# Altium PCB SolarSenseSlave.PcbDoc (part 1 of 2)
Units mm, origin at the board's own origin, x right, y up, seen from the top; angles counter-clockwise.
Board outline 120 x 80 mm, 2 copper layers (Top Layer, Bottom Layer); 75 components, 36 nets, 195 pads, 65 vias.
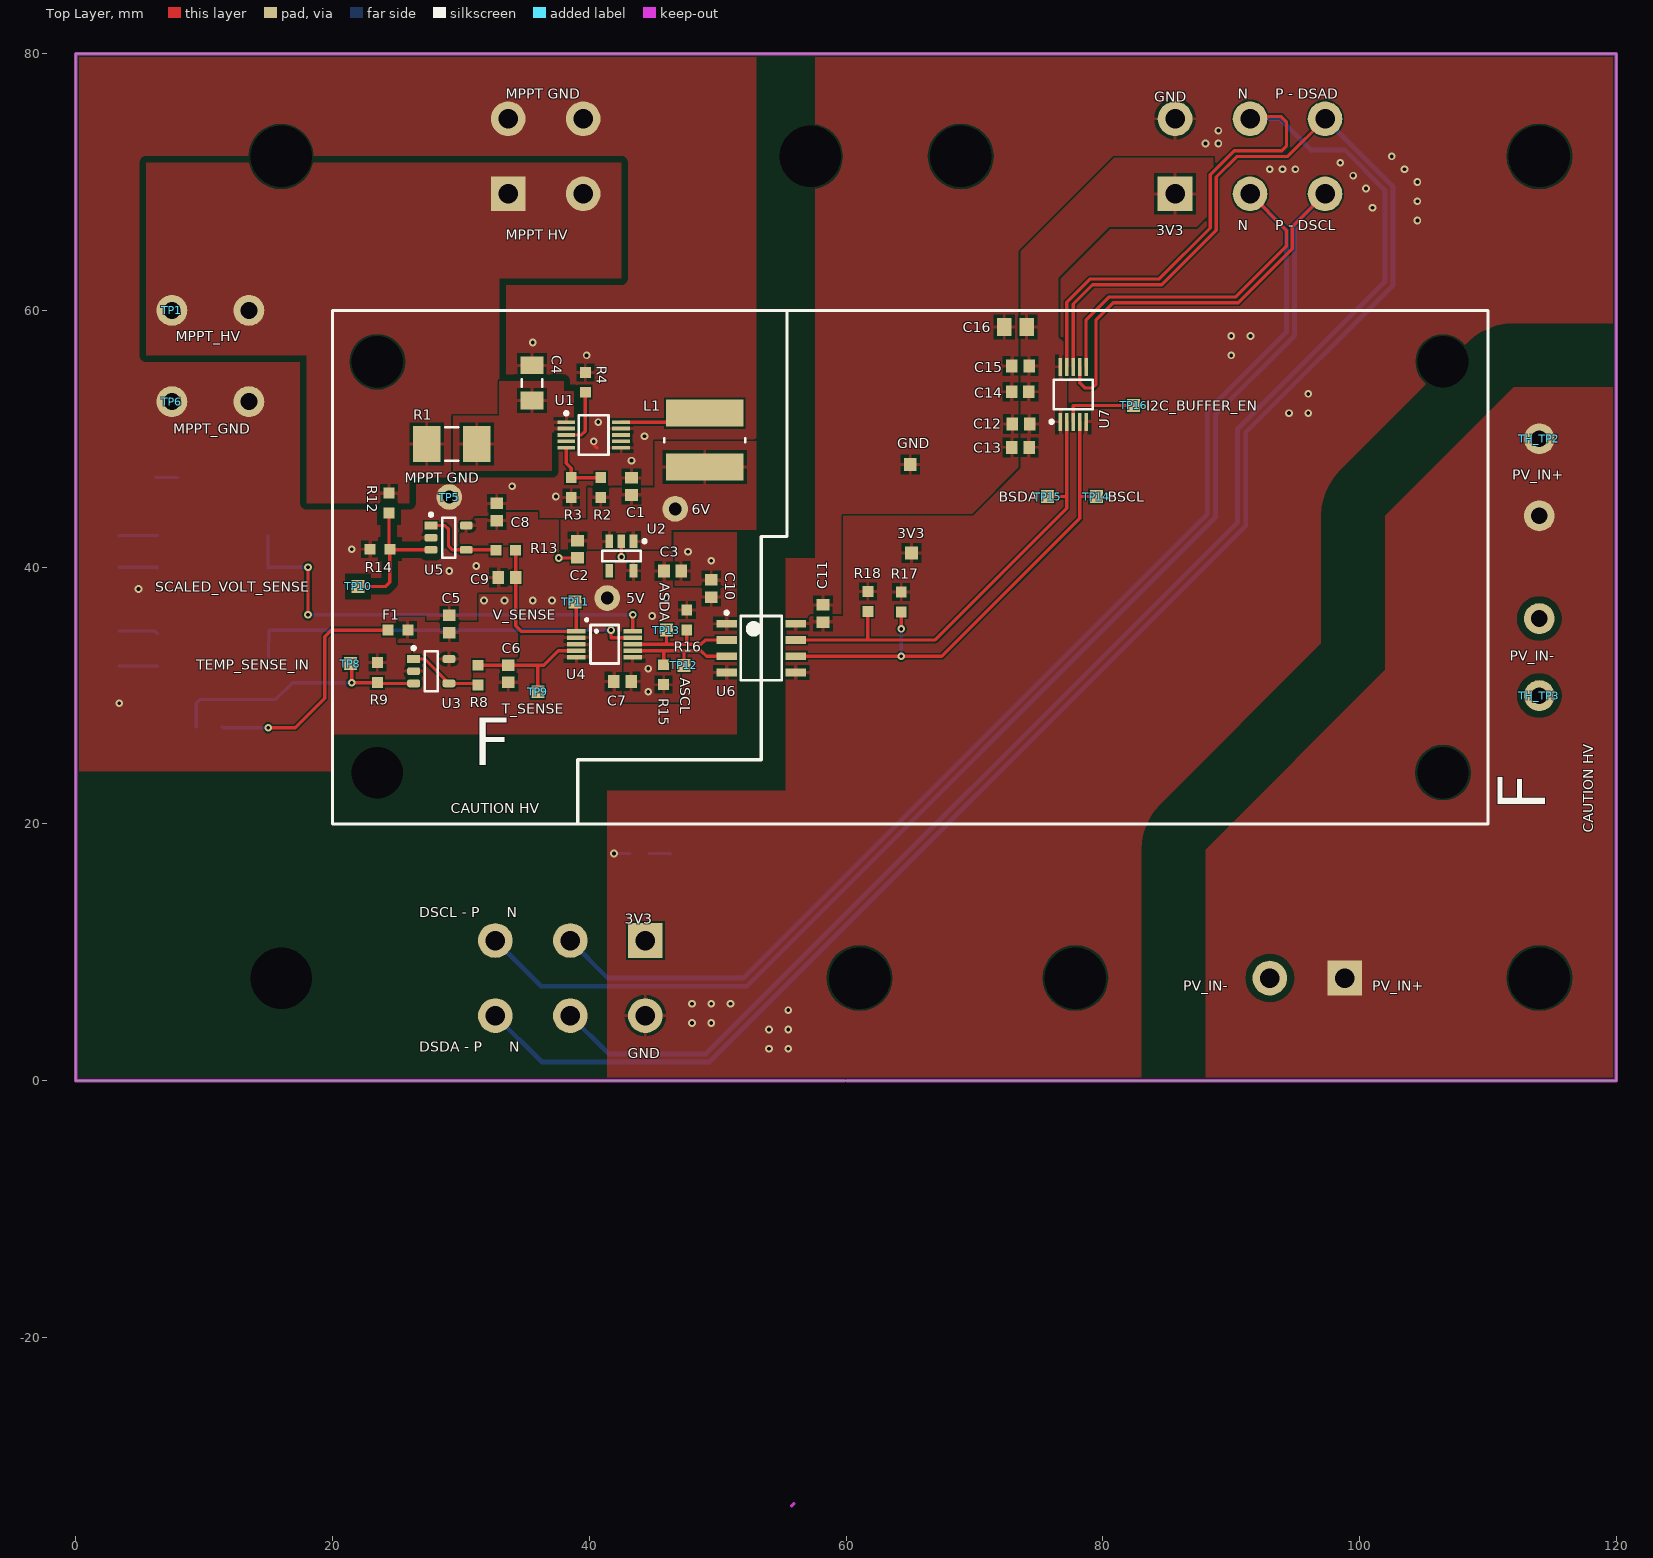
[diagram p0: Top Layer view]
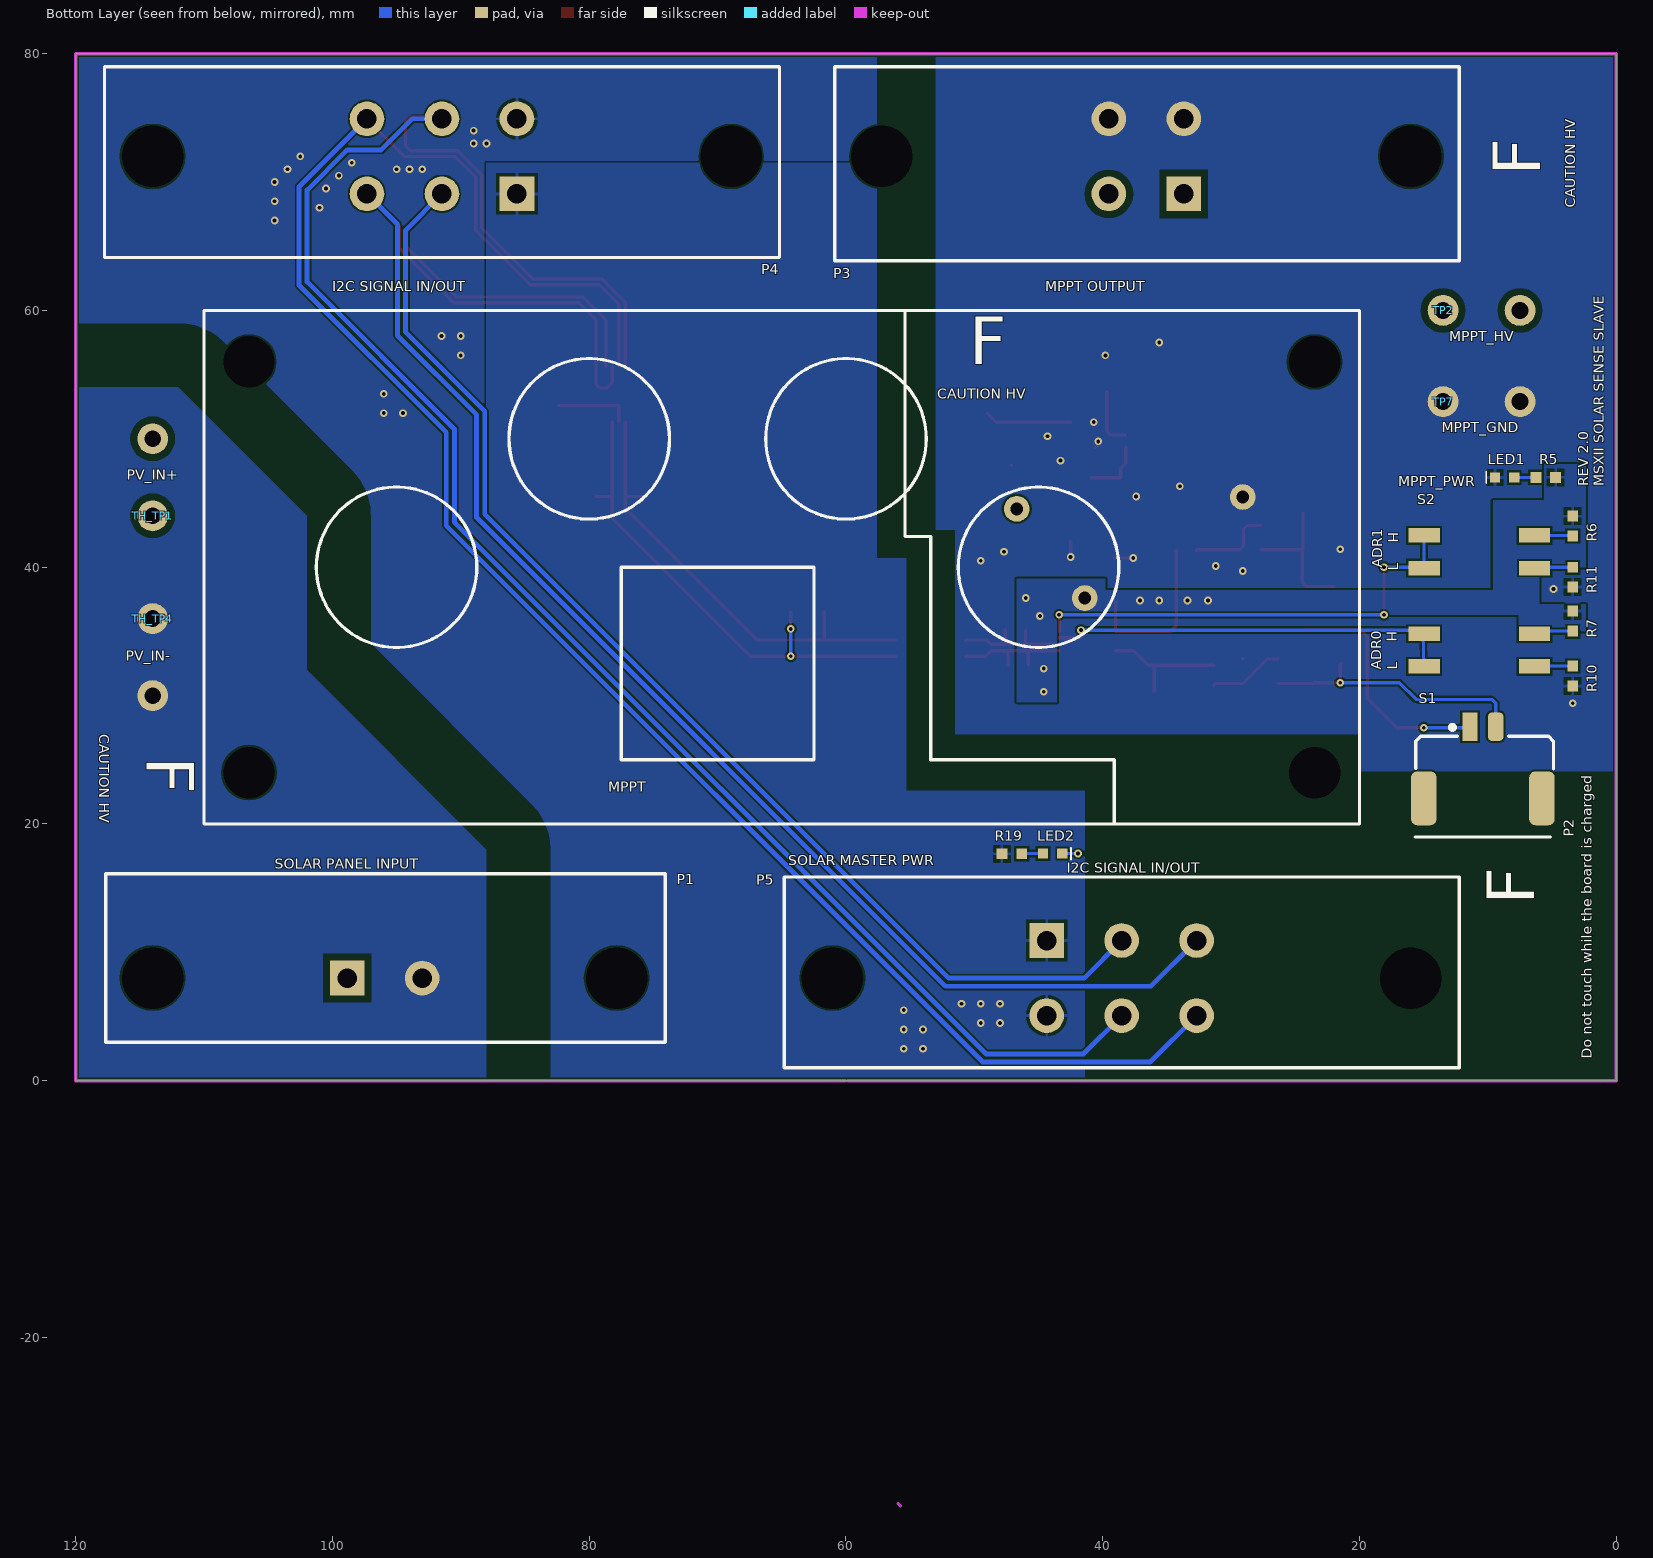
[diagram p1: Bottom Layer view, seen from below]
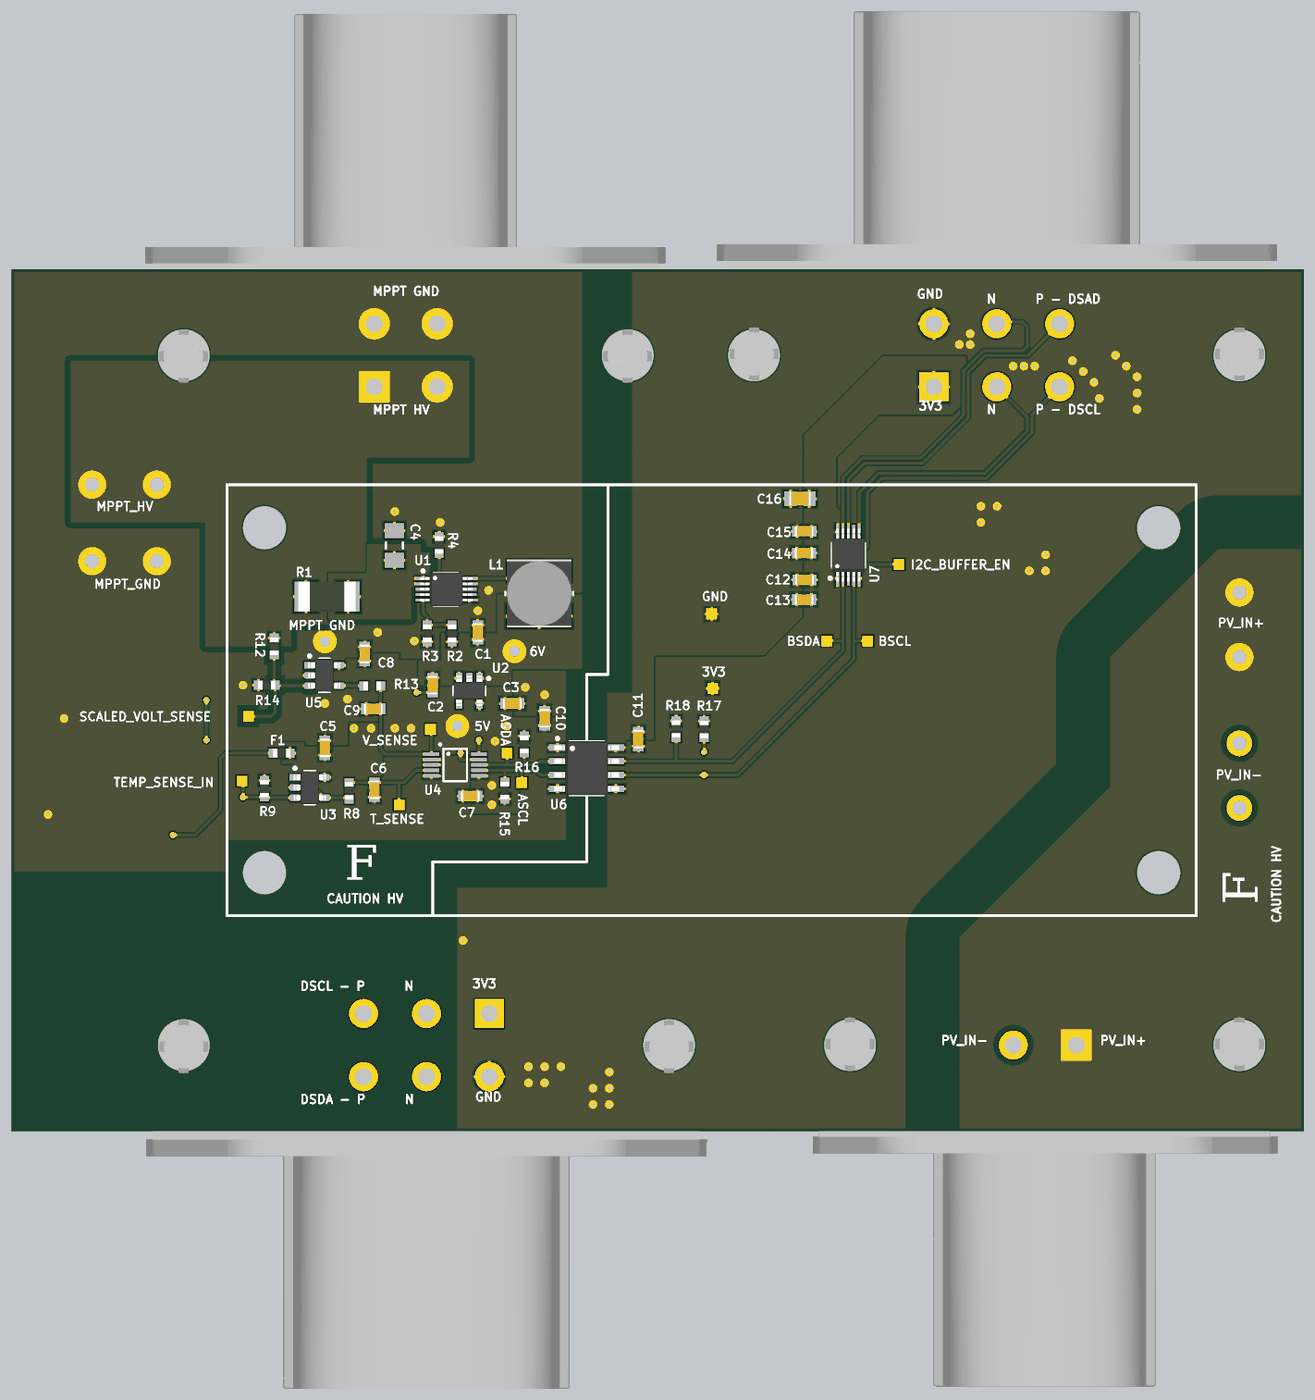
[diagram p2: 3D render of the assembled board from above, using the file's embedded part models]
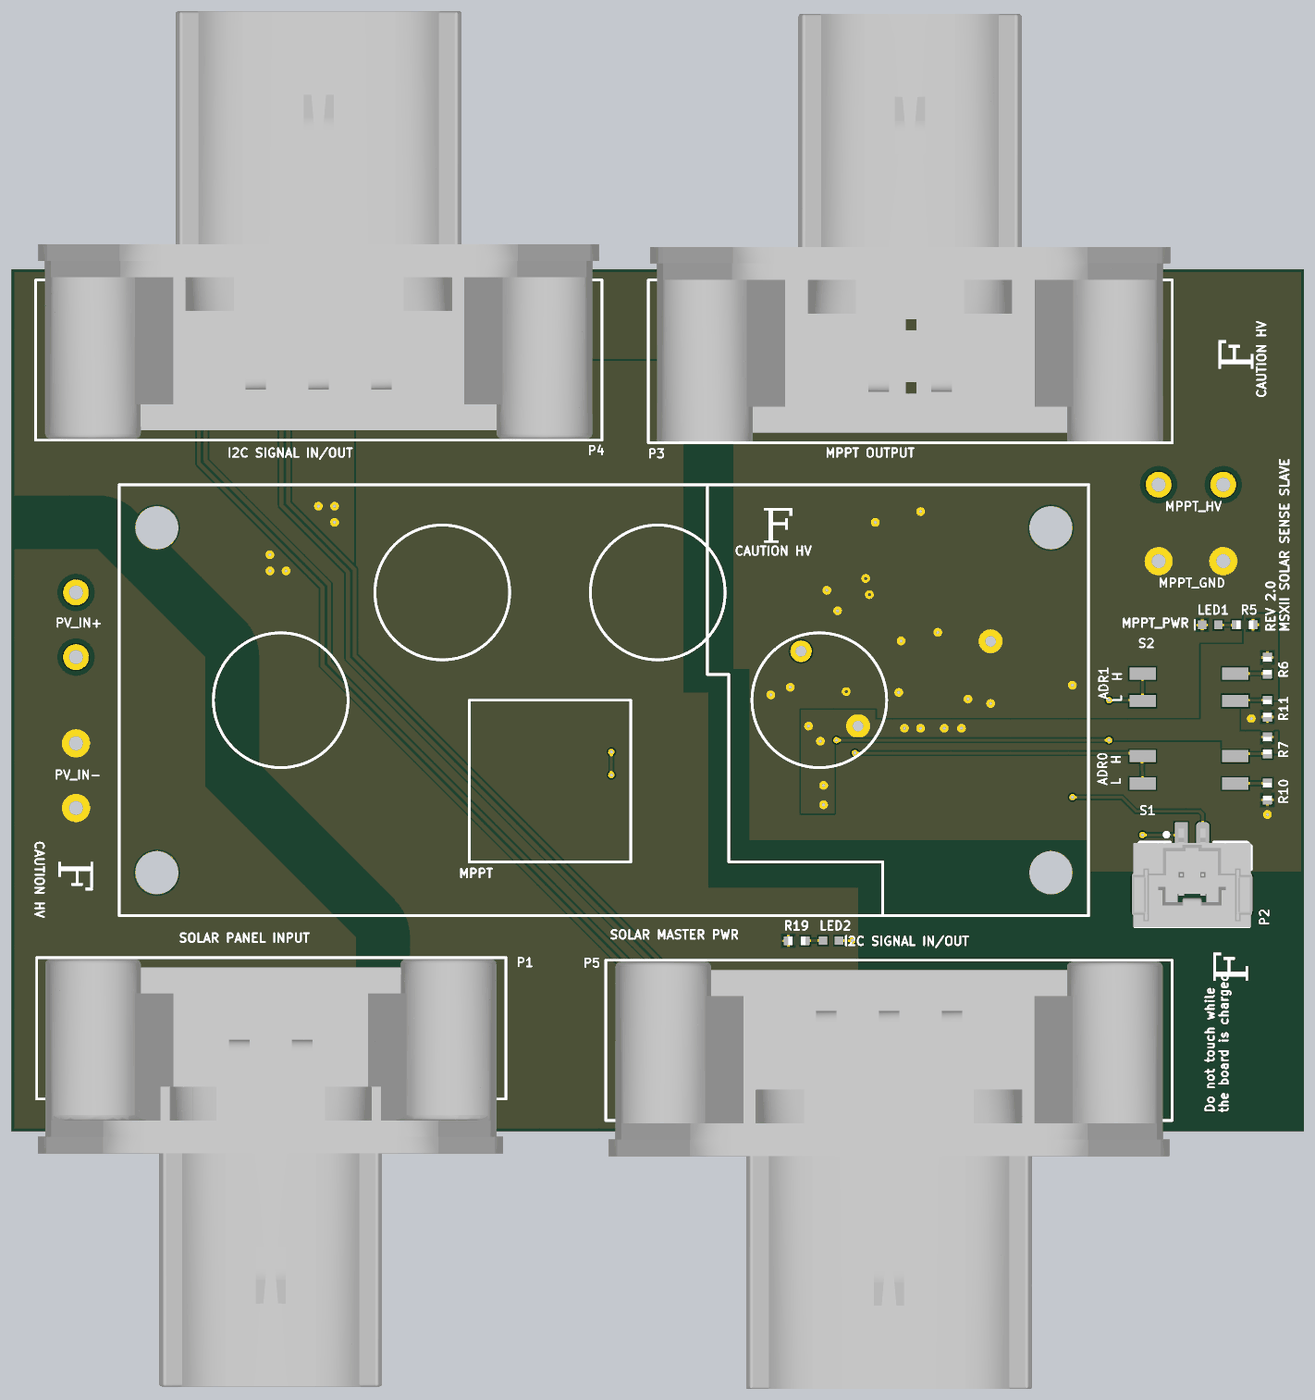
[diagram p3: 3D render of the assembled board from below, using the file's embedded part models]

## Layer stack, top to bottom
Top Solder: solder mask 0.0102, Solder Resist, Dk 3.5
Top Layer: signal copper 0.0356
Dielectric 1: dielectric 0.32, FR-4, Dk 4.8
Bottom Layer: signal copper 0.0356
Bottom Solder: solder mask 0.0102, Solder Resist, Dk 3.5

## Board outline
120,0 0,0 0,80 120,80

## Design rules (kind name [scope] priority, off if disabled: settings)
Clearance HV_Clearance_to_GND [InNetClass('HV') vs InNet('MPPT_GND')] p1: gap=0.53 ignorepadtopadclearanceinfootprint=TRUE except(0.52: Arc-SMDPad Track-SMDPad)
Clearance Clearance_PV [InNet('PV_IN+') vs InNet('PV_IN-')] p2: gap=0.53 ignorepadtopadclearanceinfootprint=TRUE except(0.52: Arc-SMDPad Track-SMDPad)
Clearance Clearance_PV_to_LOW_V [InNet('PV_IN+') OR InNet('PV_IN-') vs InNet('3V3') OR InNet('GND')] p3: gap=5 ignorepadtopadclearanceinfootprint=TRUE
Clearance [All] p4: gap=0.152 ignorepadtopadclearanceinfootprint=FALSE except(0: Arc-Hole Track-Hole SMDPad-Hole THPad-Hole Via-Hole Fill-Hole Poly-Hole Region-Hole Text-Hole)
ComponentClearance ComponentClearance_ControllerBoard [InComponent('P1') vs Identifier = 'Controller-Board'] p1: gap=0 collisioncheckmode=3 verticalgap=0 showdistances=FALSE
ComponentClearance ComponentClearance_Standoffs [Identifier = 'Standoff' vs Identifier = 'Controller-Board'] p2: gap=0 collisioncheckmode=3 verticalgap=0 showdistances=FALSE
ComponentClearance [All] p3: gap=0.254 collisioncheckmode=3 verticalgap=0.254 showdistances=FALSE
DiffPairsRouting DiffPairsRouting_DI2C [InDifferentialPair('DSCL') OR InDifferentialPair('DSDA')] p1: maxlimit=0.254 minlimit=0.2 mostfreqgap=0.2 toplayer_minwidth=0.25 toplayer_maxwidth=0.381 toplayer_prefwidth=0.254 bottomlayer_minwidth=0.25 bottomlayer_maxwidth=0.381 bottomlayer_prefwidth=0.254 maxuncoupledlength=12.7
DiffPairsRouting [All] p2: maxlimit=0.254 minlimit=0.15 mostfreqgap=0.254 toplayer_minwidth=0.2 toplayer_maxwidth=0.381 toplayer_prefwidth=0.381 bottomlayer_minwidth=0.2 bottomlayer_maxwidth=0.381 bottomlayer_prefwidth=0.381 maxuncoupledlength=12.7
Height "Height - MX150L" [HasFootprint('CONN, 4POS MX150L') OR HasFootprint('CONN, 6POS MX150L') OR HasFootprint('CONN, 2POS MX150L')] p1: minheight=0 maxheight=50 prefheight=12.7
Height [All] p2: minheight=0 maxheight=25.4 prefheight=12.7
HoleSize [All] p1: absolutevalues=TRUE maxlimit=6.3 minlimit=0.3 maxpercent=80.000 minpercent=20.000
MinimumAnnularRing [All] p1: minimumring=0.15
MinimumSolderMaskSliver [All] p1 off: minsoldermaskwidth=0.3
PolygonConnect PolygonConnect_NoThermal [Not(IsPad) vs IsPolygon] p1: connectstyle=Direct reliefconductorwidth=0.254 reliefentries=4 polygonreliefangle="90 Angle" airgapwidth=0.254
PolygonConnect PolygonConnect_HV [InNetClass('HV') OR InNet('+6V') OR InNet('MPPT_5V')] p2: thpad.connectstyle=Direct thpad.reliefconductorwidth=0.254 thpad.reliefentries=4 thpad.polygonreliefangle="90 Angle" thpad.airgapwidth=0.254 smdpad.connectstyle=Relief smdpad.reliefconductorwidth=0.254 smdpad.reliefentries=4 smdpad.polygonreliefangle="90 Angle" smdpad.airgapwidth=0.254 via.connectstyle=Relief via.reliefconductorwidth=0.254 via.reliefentries=4 via.polygonreliefangle="90 Angle" via.airgapwidth=0.254
PolygonConnect [IsPad] p3: connectstyle=Relief reliefconductorwidth=0.254 reliefentries=4 polygonreliefangle="90 Angle" airgapwidth=0.254
RoutingVias [All] p1: holewidth=0.3 width=0.6 viastyle="Through Hole" minholewidth=0.3 minwidth=0.6 maxholewidth=0.711 maxwidth=1.27
SilkToSolderMaskClearance [IsPad] p1: minsilkscreentomaskgap=0.178 clearancetoexposedcopper=TRUE
SolderMaskExpansion [All] p1: expansion=0.102
Width [All] p1: maxlimit=2.54 minlimit=0.152 preferedwidth=0.254
24 further rules are at their usual default settings.

## Classes and differential pairs
component class I2CInterface: 3V3 C10 C11 C12 C13 C14 C15 C16 GND P4 P5 R15 R16 R17 R18 TP12 TP13 TP14 TP15 TP16 U6 U7
net class HV: MPPT_GND MPPT_HV NetR12_2 PV_IN+ PV_IN- REG_VIN
component class PowerSupplies: 5V 6V C1 C2 C3 C4 L1 LED1 LED2 P1 R1 R2 R3 R4 R5 R19 TH_TP1 TH_TP2 TH_TP3 TH_TP4 TP1 TP2 TP5 TP6 TP7 U1 U2
component class SolarSenseBoard: C5 C6 C7 C8 C9 F1 P2 P3 R6 R7 R8 R9 R10 R11 R12 R13 R14 S1 S2 TP8 TP9 TP10 TP11 U3 U4 U5
differential pair DSDA: +DSDA_P -DSDA_N
differential pair DSCL: +DSCL_P -DSCL_N

## Components (designator, comment, footprint, x,y, rotation, side; value= is the part's Value field where it differs from the comment)
3V3 "3V3" "Test Point" 65.1,41.1 r270 top (schematic designator TP17)
5V "MPPT_5V" "Thru Test Point"#1 41.4,37.6 r270 top (schematic designator TP4)
6V "MPPT_6V" "Thru Test Point"#1 46.7,44.544 r0 top (schematic designator TP3)
C1 "CAP CER 10uF 25V 20% X5R 0603" "CAP, 0603" 43.3,46.3 r90 top
C2 "CAP CER 1UF 50V 10% X7R 0603" "CAP, 0603" 39.1,41.4 r270 top
C3 "CAP CER 2.2UF 25V 10% X5R 0603" "CAP, 0603" 46.5,39.7 r0 top
C4 "CAP CER 2.2UF 100V ±20% X7R 1206" "CAP, 1206" 35.553,54.354 r90 top
C5 "CAP CER 0.1UF 50V 10% X7R 0603" "CAP, 0603" 29.1,35.579 r90 top
C6 "CAP CER 10nF 50V 5% X7R 0603" "CAP, 0603" 33.7,31.7 r270 top
C7 "CAP CER 0.1UF 50V 10% X7R 0603" "CAP, 0603" 42.6,31.1 r180 top
C8 "CAP CER 0.1UF 50V 10% X7R 0603" "CAP, 0603" 32.8,44.3 r90 top
C9 "CAP CER 10nF 50V 5% X7R 0603" "CAP, 0603" 33.6,39.2 r180 top
C10 "CAP CER 0.1UF 50V 10% X7R 0603" "CAP, 0603" 49.5,38.334 r90 top
C11 "CAP CER 0.1UF 50V 10% X7R 0603" "CAP, 0603" 58.2,36.4 r90 top
C12 "CAP CER 0.1UF 50V 10% X7R 0603" "CAP, 0603" 73.625,51.164 r180 top
C13 "CAP CER 0.1UF 50V 10% X7R 0603" "CAP, 0603" 73.587,49.334 r180 top
C14 "CAP CER 0.1UF 50V 10% X7R 0603" "CAP, 0603" 73.575,53.664 r180 top
C15 "CAP CER 0.1UF 50V 10% X7R 0603" "CAP, 0603" 73.6,55.664 r180 top
C16 "CAP CER 10uF 25V 10% X5R 0805" "CAP, 0805" 73.2,58.7 r180 top
F1 "FUSE 250MA 32VDC 0603" "RES, 0603" 25.1,35.1 r0 top
GND "GND" "Test Point" 65,48 r270 top (schematic designator TP18)
L1 "IND 220uH 0.59A 20%" INDP6060X23N 49,49.9 r270 top
LED1 "LED GREEN CLEAR 2V 0603" LED_0603 8,47 r0 bottom
LED2 "LED GREEN CLEAR 2V 0603" LED_0603 44.611,17.69 r180 bottom
P1 "CONN 2POS MX150L" "CONN, 2POS MX150L" 98.85,8 r180 bottom locked
P2 "Dura-Clik" "CONN, 2POS Dura-Click Vertical" 11.4,27.58 r180 bottom
P3 "CONN 4POS MX150L" "CONN, 4POS MX150L" 33.69,69.075 r0 bottom locked
P4 "CONN 6POS MX150L" "CONN, 6POS MX150L" 85.63,69.075 r0 bottom locked
P5 "CONN 6POS MX150L" "CONN, 6POS MX150L" 44.37,10.925 r180 bottom locked
R1 "RES 820 OHM 5% 3/4W 2010" "RES 2010" 29.3,49.6 r0 top
R2 "RES 255K OHM 1% 1/10W 0603" "RES, 0603" 40.9,46.2 r270 top
R3 "RES 39.2K OHM 1% 1/10W 0603" "RES, 0603" 38.6,46.2 r270 top
R4 "RES 191K OHM 1% 1/10W 0603" "RES, 0603" 39.7,54.4 r90 top
R5 "RES 3.3K OHM 1% 1/4W 0603" "RES, 0603" 5.5,47 r0 bottom
R6 "RES 10K OHM 1% 1/10W 0603" "RES, 0603" 3.4,43.2 r270 bottom
R7 "RES 10K OHM 1% 1/10W 0603" "RES, 0603" 3.4,35.8 r270 bottom
R8 "RES 100 OHM 1% 1/10W 0603" "RES, 0603" 31.351,31.586 r90 top
R9 "RES 10K OHM 1% 1/10W 0603" "RES, 0603" 23.5,31.8 r90 top
R10 "RES 10K OHM 1% 1/10W 0603" "RES, 0603" 3.4,31.525 r270 bottom
R11 "RES 10K OHM 1% 1/10W 0603" "RES, 0603" 3.4,39.225 r270 bottom
R12 "RES 470K OHM 1% 1/4W 0603" "RES, 0603" 24.4,45 r270 top
R13 "RES 100 OHM 1% 1/10W 0603" "RES, 0603" 33.5,41.324 r0 top
R14 "RES 26.1K OHM 1% 1/10W 0603" "RES, 0603" 23.7,41.4 r180 top
R15 "RES 3.3K OHM 1% 1/4W 0603" "RES, 0603" 45.8,31.625 r90 top
R16 "RES 3.3K OHM 1% 1/4W 0603" "RES, 0603" 47.6,35.9 r270 top
R17 "RES 3.3K OHM 1% 1/4W 0603" "RES, 0603" 64.3,37.3 r270 top
R18 "RES 3.3K OHM 1% 1/4W 0603" "RES, 0603" 61.7,37.325 r270 top
R19 "RES 3.3K OHM 1% 1/4W 0603" "RES, 0603" 47.086,17.68 r180 bottom
S1 "SPST" "SW SPST 2POS DIP 0.1A 20V" 10.675,34.815 r270 bottom
S2 "SPST" "SW SPST 2POS DIP 0.1A 20V" 10.675,42.475 r270 bottom
TH_TP1 "PV_IN+" "Thru Test Point"#2 114,44 r180 bottom
TH_TP2 "PV_IN+" "Thru Test Point"#2 114,50 r180 top
TH_TP3 "PV_IN-" "Thru Test Point"#2 114,30 r180 top
TH_TP4 "PV_IN-" "Thru Test Point"#2 114,36 r180 bottom
TP1 "MPPT_HV" "Thru Test Point"#2 7.5,60 r90 top
TP2 "MPPT_HV" "Thru Test Point"#2 13.5,60 r0 bottom
TP5 "MPPT GND" "Thru Test Point"#1 29.1,45.468 r0 top
TP6 "MPPT_GND" "Thru Test Point"#2 7.5,52.9 r270 top
TP7 "MPPT_GND" "Thru Test Point"#2 13.5,52.9 r270 bottom
TP8 "TEMP_SENSE_IN" "Test Point" 21.4,32.5 r180 top
TP9 "T_SENSE" "Test Point" 36,30.3 r90 top
TP10 "SCALED_VOLT_SENSE" "Test Point" 22,38.5 r270 top
TP11 "V_SENSE" "Test Point" 38.9,37.3 r270 top
TP12 "ASCL" "Test Point" 47.381,32.349 r270 top
TP13 "ASDA" "Test Point" 46.019,35.1 r270 top
TP14 "BSCL" "Test Point" 79.5,45.5 r270 top
TP15 "BSDA" "Test Point" 75.7,45.5 r270 top
TP16 "I2C_BUFFER_EN" "Test Point" 82.4,52.6 r270 top
U1 "IC REG BUCK ADJ 0.1A 10UMAX" TSSOP50P490X110-10N 40.351,50.3 r0 top
U2 "IC REG LDO 5V 0.1A SOT23-5" SOT95P280X145-5N 42.504,40.875 r270 top
U3 "IC OP AMP GEN PURPOSE RR 10MHZ SOT-23-5" "IC OP AMP GP RR 10MHZ SOT-23-5" 27.7,31.9 r0 top
U4 "IC ADC MCP3427 10MSOP" "IC ADC MCP3427" 41.2,34 r0 top
U5 "IC OP AMP GEN PURPOSE RR 10MHZ SOT-23-5" "IC OP AMP GP RR 10MHZ SOT-23-5" 29.051,42.3 r0 top
U6 "IC DGTL ISO I2C 3.75KV 2CH 8SOIC" "IC DGTL ISO 3.75KV I2C 8SOIC NARROW BODY" 53.4,33.7 r0 top
U7 "IC DIFFERENTIAL I2C BUFFER PCA9615" TSSOP50P490X110-10N 77.7,53.464 r90 top

## Footprints (in the part's own frame and the unit in brackets; to place one, negate y for a bottom-side part, rotate by r counter-clockwise, add the part's x,y. Pads: shape width x height; smd on the part's side, far side on the other; paste and mask are expansions set on the pad)
"CAP, 0603" [mm] "Chip Capacitor, 2-Leads, Body 1.60x0.81mm, IPC Medium Density"
  rect 0.9x1 smd mask+0.076: 1(-0.675,0) 2(0.675,0)
  body extent -0.87,-0.48 0.87,0.48, height 0.9
"CAP, 0805" [mm] "Chip Capacitor, 2-Leads, Body 2.00x1.25mm, IPC Medium Density"
  rect 1.15x1.4 smd: 1(-0.875,0) 2(0.875,0)
  body extent -1,-0.63 1,0.62, height 1.25
"CAP, 1206" [mm] "Chip Capacitor, 2-Leads, Body 3.20x1.60mm, IPC Medium Density"
  rect 1.4x1.8 smd: 1(-1.375,0) 2(1.375,0)
  silkscreen extent -0.3,-0.8 0.3,0.8, body extent -1.68,-0.87 1.67,0.87, height 1.8
"CONN, 2POS Dura-Click Vertical" [mm] "WM7169CT-ND"
  rect 1.2x2.2 smd: 1(0,0)
  rrect50% 1.2x2.2 smd: 2(2,0)
  rrect50% 2x4.2 smd: 3(-3.6,-5.58) 3(5.6,-5.58)
  silkscreen extent -4.28,-8.6 6.5,0.05, body extent -4.45,-8.64 6.45,0.51, height 8
"CONN, 2POS MX150L" [mm]
  rect 2.7x2.7 hole 1.52: 1(0,0)
  round 2.7 hole 1.52: 2(5.84,0)
  round 0 hole 4.78: ""(-15.15,0) ""(20.99,0)
  silkscreen extent -18.8,-5 24.77,8.13, body extent -18.67,-31.66 24.51,8, height 29.78
"CONN, 4POS MX150L" [mm]
  rect 2.7x2.7 hole 1.52: 1(0,0)
  round 2.7 hole 1.52: 2(5.84,0) 3(0,-5.85) 4(5.84,-5.85)
  round 0 hole 4.78: ""(-17.69,-2.925) ""(23.53,-2.925)
  silkscreen extent -21.46,-9.91 27.18,5.21, body extent -21.26,-34.59 27,5.05, height 32.31
"CONN, 6POS MX150L" [mm]
  rect 2.7x2.7 hole 1.52: 1(0,0)
  round 2.7 hole 1.52: 2(5.84,0) 3(11.68,0) 4(0,-5.85) 5(5.84,-5.85) 6(11.68,-5.85)
  round 0 hole 4.78: ""(-16.69,-2.925) ""(28.37,-2.925)
  silkscreen extent -20.45,-9.91 32.13,4.95, body extent -20.2,-34.82 31.88,4.83, height 32.32
"IC ADC MCP3427" [mm]
  rect 1.45x0.345 smd: 1(-2.2,1) 2(-2.2,0.5) 3(-2.2,0) 4(-2.2,-0.5) 5(-2.2,-1) 6(2.2,-1) 7(2.2,-0.5) 8(2.2,0) 9(2.2,0.5) 10(2.2,1)
  silkscreen extent -1.5,-1.5 1.1,2, body extent -2.45,-1.5 2.45,1.5, height 1.09
"IC DGTL ISO 3.75KV I2C 8SOIC NARROW BODY" [mm] "SOIC, 8-Leads, Body 4.90x3.90mm, Pitch 1.27mm, IPC Medium Density"
  rect 1.6x0.6 smd: 1(-2.7,1.905) 2(-2.7,0.635) 3(-2.7,-0.635) 4(-2.7,-1.905) 5(2.7,-1.905) 6(2.7,-0.635) 7(2.7,0.635) 8(2.7,1.905)
  silkscreen extent -2.82,-2.5 1.6,2.88, body extent -3,-2.5 3,2.5, height 1.75
"IC OP AMP GP RR 10MHZ SOT-23-5" [mm] "SOT23, 5-Leads, Body 2.90x2.80mm, Pitch 0.95mm, IPC Medium Density"
  rect 1x0.6 smd: 1(-1.375,0.95)
  rrect50% 1x0.6 smd: 2(-1.375,0) 3(-1.375,-0.95) 4(1.375,-0.95) 5(1.375,0.95)
  silkscreen extent -1.5,-1.55 0.5,1.92, body extent -1.5,-1.53 1.5,1.53, height 1.45
INDP6060X23N [mm] "Precision Wire Wound Inductor, 2-Leads, Body 6.00x6.00mm, IPC Medium Density"
  rect 2.1x6 smd: 1(-2.1,0) 2(2.1,0)
  silkscreen extent -0.15,-3.15 0.15,3.15, body extent -3.1,-3 3.1,3, height 2.39
LED_0603 [mm]
  rect 0.8x0.8 smd: 1(-0.05,0.01) 2(1.45,0.01)
  silkscreen extent 2.13,-0.46 2.13,0.45, body extent -0.09,-0.39 1.51,0.41, height 0.8
"RES 2010" [mm] "Chip Resistor, 2-Leads, Body 5.08x2.54mm, IPC Medium Density"
  rect 2.15x2.8 smd: 1(-1.95,0) 2(1.95,0)
  silkscreen extent -0.5,-1.3 0.5,1.3, body extent -2.67,-1.4 2.67,1.4, height 1.04
"RES, 0603" [mm] "Chip Resistor, 2-Leads, Body 1.60x0.80mm, IPC Medium Density"
  rect 0.85x0.85 smd: 1(-0.775,0) 2(0.775,0)
  body extent -0.8,-0.4 0.8,0.4, height 0.55
SOT95P280X145-5N [mm] "SOT23, 5-Leads, Body 2.95x2.80mm, Pitch 0.95mm, IPC Medium Density"
  rect 1.05x0.6 smd: 1(-1.15,0.95) 2(-1.15,0) 3(-1.15,-0.95) 4(1.15,-0.95) 5(1.15,0.95)
  silkscreen extent -1.27,-1.5 0.4,1.93, body extent -1.4,-1.48 1.4,1.48, height 1.45
"SW SPST 2POS DIP 0.1A 20V" [mm] "Dip Switch SPST 2 Position Surface Mount Slide (Standard) Actuator 100mA 20VDC"
  rect 1.13x2.44 smd: 1(0,-4.3) 2(0,4.3) 3(2.54,-4.3) 4(2.54,4.3)
  body extent -2.18,-4.96 4.36,4.96, height 4.4
"Test Point" [mm]
  rect 1x1 smd paste-2: TP(0,0)
"Thru Test Point"#1 [mm]
  round 2 hole 1: TH_TP(0,0)
"Thru Test Point"#2 [mm]
  round 2.4 hole 1.3: TH_TP(0,0)
TSSOP50P490X110-10N [mm] "TSSOP, 10-Leads, Body 3.00x3.00mm, Pitch 0.50mm, IPC Medium Density"
  rect 1.4x0.28 smd: 1(-2.14,1) 2(-2.14,0.5) 3(-2.14,0) 4(-2.14,-0.5) 5(-2.14,-1) 6(2.14,-1) 7(2.14,-0.5) 8(2.14,0) 9(2.14,0.5) 10(2.14,1)
  silkscreen extent -2.26,-1.52 1.15,1.81, body extent -2.45,-1.55 2.45,1.55, height 1.1

## Part data
3V3 GND TP8 TP9 TP10 TP11 TP12 TP13 TP14 TP15 TP16: library part "Test Point"
5V 6V TH_TP1 TH_TP2 TH_TP3 TH_TP4 TP1 TP2 TP5 TP6 TP7: library part "Thru Test Point"
C1: "10µF ±20% 25V Ceramic Capacitor X5R 0603 (1608 Metric)", Capacitance=10µF, Manufacturer 1="Murata Electronics North America", Manufacturer Part Number 1=GRM188R61E106MA73D, Operating Temperature="-55°C ~ 85°C", Package / Case="0603 (1608 Metric)", Ratings=-, Supplier Part Number 1=490-7202-1-ND, Temperature Coefficient=X5R, Tolerance=±20%, Voltage=25V, ComponentLink1Description=http://www.murata.com/~/media/webrenewal/support/library/catalog/products/capacitor/mlcc/c02e.ashx, ComponentLink1URL=http://www.murata.com/~/media/webrenewal/support/library/catalog/products/capacitor/mlcc/c02e.ashx, Height - Seated (Max)=-, Lead Spacing=-, Lead Style=-, Mounting Type="Surface Mount, MLCC", Packaging="Cut Tape (CT)", Part Status=Active, Size / Dimension="0.063\" L x 0.031\" W (1.60mm x 0.80mm)", Supplier 1=Digi-Key, Thickness (Max)="0.031\" (0.80mm)"
C2: "1µF ±10% 50V Ceramic Capacitor X7R 0603 (1608 Metric)", Capacitance=1µF, Manufacturer 1="Taiyo Yuden", Manufacturer Part Number 1=UMK107AB7105KA-T, Operating Temperature="-55°C ~ 125°C", Package / Case="0603 (1608 Metric)", Ratings=-, Supplier Part Number 1=587-3247-1-ND, Temperature Coefficient=X7R, Tolerance=±10%, Voltage=50V, ComponentLink1Description=http://www.yuden.co.jp/productdata/catalog/en/mlcc_all_e.pdf, ComponentLink1URL=http://www.yuden.co.jp/productdata/catalog/en/mlcc_all_e.pdf, Height - Seated (Max)=-, Lead Spacing=-, Lead Style=-, Mounting Type="Surface Mount, MLCC", Packaging="Cut Tape (CT)", Part Status=Active, Size / Dimension="0.063\" L x 0.031\" W (1.60mm x 0.80mm)", Supplier 1=Digi-Key, Thickness (Max)="0.037\" (0.95mm)"
C3: "2.2µF ±10% 25V Ceramic Capacitor X5R 0603 (1608 Metric)", Capacitance=2.2µF, Manufacturer 1="Murata Electronics North America", Manufacturer Part Number 1=GRM188R61E225KA12D, Operating Temperature="-55°C ~ 85°C", Package / Case="0603 (1608 Metric)", Ratings=-, Supplier Part Number 1=490-10731-1-ND, Temperature Coefficient=X5R, Tolerance=±10%, Voltage=25V, ComponentLink1Description=http://www.murata.com/~/media/webrenewal/support/library/catalog/products/capacitor/mlcc/c02e.ashx, ComponentLink1URL=http://www.murata.com/~/media/webrenewal/support/library/catalog/products/capacitor/mlcc/c02e.ashx, Height - Seated (Max)=-, Lead Spacing=-, Lead Style=-, Mounting Type="Surface Mount, MLCC", Packaging="Cut Tape (CT)", Part Status=Active, Size / Dimension="0.063\" L x 0.031\" W (1.60mm x 0.80mm)", Supplier 1=Digi-Key, Thickness (Max)="0.035\" (0.90mm)"
C4: "2.2µF ±20% 100V Ceramic Capacitor X7R 1206 (3216 Metric)", Capacitance=2.2µF, Manufacturer 1="Murata Electronics North America", Manufacturer Part Number 1=GRM31CR72A225MA73L, Operating Temperature="-55°C ~ 125°C", Package / Case="1206 (3216 Metric)", Ratings=-, Supplier Part Number 1=490-12773-1-ND, Temperature Coefficient=X7R, Tolerance=±20%, Voltage=100V, ComponentLink1Description=http://www.murata.com/~/media/webrenewal/support/library/catalog/products/capacitor/mlcc/c02e.ashx, ComponentLink1URL=http://www.murata.com/~/media/webrenewal/support/library/catalog/products/capacitor/mlcc/c02e.ashx, Height - Seated (Max)=-, Lead Spacing=-, Lead Style=-, Mounting Type="Surface Mount, MLCC", Packaging="Cut Tape (CT)", Part Status=Active, Size / Dimension="0.126\" L x 0.063\" W (3.20mm x 1.60mm)", Supplier 1=Digi-Key, Thickness (Max)="0.071\" (1.80mm)"
C5 C7 C8 C10 C11 C12 C13 C14 C15: "0.10µF ±10% 50V Ceramic Capacitor X7R 0603 (1608 Metric)", Capacitance=0.1µF, Manufacturer 1="AVX Corporation", Manufacturer Part Number 1=06035C104KAT2A, Operating Temperature="-55°C ~ 125°C", Package / Case="0603 (1608 Metric)", Ratings=-, Supplier Part Number 1=478-5052-1-ND, Temperature Coefficient=X7R, Tolerance=±10%, Voltage=50V, ComponentLink1Description=http://datasheets.avx.com/X7RDielectric.pdf, ComponentLink1URL=http://datasheets.avx.com/X7RDielectric.pdf, Height - Seated (Max)=-, Lead Spacing=-, Lead Style=-, Mounting Type="Surface Mount, MLCC", Packaging="Cut Tape (CT)", Part Status=Active, Size / Dimension="0.063\" L x 0.032\" W (1.60mm x 0.81mm)", Supplier 1=Digi-Key, Thickness (Max)="0.035\" (0.90mm)"
C6 C9: "10000pF ±5% 50V Ceramic Capacitor U2J 0603 (1608 Metric)", Capacitance=10000pF, Manufacturer 1=KEMET, Manufacturer Part Number 1=C0603C103J5JAC7867, Operating Temperature="-55°C ~ 125°C", Package / Case="0603 (1608 Metric)", Ratings=-, Supplier Part Number 1=399-13384-1-ND, Temperature Coefficient=U2J, Tolerance=±5%, Voltage=50V, ComponentLink1Description=http://www.kemet.com/docfinder?Partnumber=C0603C103J5JAC7867, ComponentLink1URL=http://www.kemet.com/docfinder?Partnumber=C0603C103J5JAC7867, Failure Rate=-, Height - Seated (Max)=-, Lead Spacing=-, Lead Style=-, Mounting Type="Surface Mount, MLCC", Packaging="Cut Tape (CT)", Part Status=Active, Size / Dimension="0.063\" L x 0.032\" W (1.60mm x 0.80mm)", Supplier 1=Digi-Key, Thickness (Max)="0.034\" (0.87mm)"
C16: "10µF ±10% 25V Ceramic Capacitor X5R 0805 (2012 Metric)", Capacitance=10µF, Manufacturer="Murata Electronics North America", Manufacturer Part Number=GRM21BR61E106KA73L, Operating Temperature="-55°C ~ 85°C", Package / Case="0805 (2012 Metric)", Ratings=-, Supplier Part Number 1=490-5523-1-ND, Temperature Coefficient=X5R, Tolerance=±10%, Voltage - Rated=25V, Applications="General Purpose", Category=Capacitors, ComponentLink1Description=http://search.murata.co.jp/Ceramy/image/img/A01X/G101/ENG/GRM21BR61E106KA73-01.pdf, ComponentLink1URL=http://search.murata.co.jp/Ceramy/image/img/A01X/G101/ENG/GRM21BR61E106KA73-01.pdf, Features=-, Height - Seated (Max)=-, Lead Spacing=-, Lead Style=-, Mounting Type="Surface Mount, MLCC", Packaging="Cut Tape (CT)", Part Status=Active, Pricing 1="1=0.3, 10=0.214, 100=0.1008, 500=0.07068, 1000=0.05851 (CAD)", RoHS="RoHS Compliant", Size / Dimension="0.079\" L x 0.049\" W (2.00mm x 1.25mm)", Stock 1=1695157, Supplier 1=Digi-Key, Thickness (Max)="0.053\" (1.35mm)"
F1: Case/Package=0603, Case Code (Metric)=1608, Current Rating=250mA, DC Cold Resistance=650mR, Manufacturer="Kyocera AVX", Manufacturer Part Number=F0603E0R25FSTR, Max Operating Temperature=125°C, Max Voltage Rating (DC)=32V, Min Operating Temperature=-55°C, Package Quantity=1, Supplier Part Number 1=478-2858-1-ND, Approvals=UL, Case Code (Imperial)=0603, ComponentLink1Description=https://datasheet.ciiva.com/301/accug2-301328.pdf, ComponentLink1URL=https://datasheet.ciiva.com/301/accug2-301328.pdf, ComponentLink2Description=https://datasheet.ciiva.com/301/accug2-301329.pdf, ComponentLink2URL=https://datasheet.ciiva.com/301/accug2-301329.pdf, ComponentLink3Description=https://datasheet.ciiva.com/7650/accugrd-7650774.pdf, ComponentLink3URL=https://datasheet.ciiva.com/7650/accugrd-7650774.pdf, ComponentLink4Description=https://datasheet.ciiva.com/28473/1819437-28473548.pdf, ComponentLink4URL=https://datasheet.ciiva.com/28473/1819437-28473548.pdf, ComponentLink5Description=https://datasheet.ciiva.com/301/accug2-301327.pdf, ComponentLink5URL=https://datasheet.ciiva.com/301/accug2-301327.pdf, Composition="Thin Film", Contact Plating=Tin,Matte, Depth=0.81mm, Fuse Current=250mA, Fuse Type="Board Mount (Cartridge Style Excluded)", Height=0.63mm, Lead Free="Lead Free", Length=1.6mm, Mount="Surface Mount", Number of Pins=2, Packaging="Tape and Reel", Pricing 1="1=0.41, 5=0.394, 10=0.381, 50=0.3206, 100=0.2662, 250=0.242, 500=0.2057, 1000=0.1815 (USD)", Radiation Hardening=No, REACH SVHC="No SVHC", Resistance=650mR, Stock 1=48569, Supplier 1=Digi-Key, Terminal Material=Nickel, Voltage Rating=32V, Voltage Rating (AC)=32V, Voltage Rating (DC)=32V, Width=0.81mm
L1: "220µH Shielded Inductor 590mA 834 mOhm Nonstandard", Current - Saturation=700mA, Current Rating=590mA, DC Resistance (DCR)="834 mOhm", Frequency - Self Resonant=3.5MHz, Inductance=220µH, Manufacturer 1="Laird-Signal Integrity Products", Manufacturer Part Number 1=TYS6045221M-10, Operating Temperature="-40°C ~ 125°C", Package / Case=Nonstandard, Q @ Freq=-, Ratings=AEC-Q200, Supplier Part Number 1=240-2742-1-ND, Tolerance=±20%, ComponentLink1Description=http://assets.lairdtech.com/home/brandworld/files/TYS6045221M-10.pdf, ComponentLink1URL=http://assets.lairdtech.com/home/brandworld/files/TYS6045221M-10.pdf, Height - Seated (Max)="0.185\" (4.70mm)", Material - Core=-, Mounting Type="Surface Mount", Packaging="Cut Tape (CT)", Part Status=Active, Shielding=Shielded, Size / Dimension="0.236\" L x 0.236\" W (6.00mm x 6.00mm)", Supplier 1=Digi-Key, Supplier Device Package=-, Type=-
LED1 LED2: "Green 572nm LED Indication - Discrete 2V 0603 (1608 Metric)", Color=Green, Current - Test=20mA, Lens Color=Colorless, Manufacturer="Wurth Electronics Inc.", Manufacturer Part Number=150060VS75000, Millicandela Rating=40mcd, Package / Case="0603 (1608 Metric)", Supplier Device Package=0603, Supplier Part Number 1=732-4980-1-ND, Voltage - Forward (Vf) (Typ)=2V, Category=Optoelectronics, ComponentLink1Description=http://katalog.we-online.de/led/datasheet/150060VS75000.pdf, ComponentLink1URL=http://katalog.we-online.de/led/datasheet/150060VS75000.pdf, Features=-, Height (Max)=0.80mm, Lens Style/Size="Rectangle with Flat Top, 1.10mm x 0.70mm", Lens Transparency=Clear, Mounting Type="Surface Mount", Packaging="Cut Tape (CT)", Part Status=Active, Pricing 1="1=0.21, 100=0.1617, 500=0.13964 (CAD)", RoHS="RoHS Compliant", Size / Dimension="1.60mm L x 0.80mm W", Stock 1=9408, Supplier 1=Digi-Key, Viewing Angle=140°, Wavelength - Dominant=570nm, Wavelength - Peak=572nm
P1: "Connector Header Panel Mount, Through Hole, Right Angle 2 position 0.230\" (5.84mm)", Current Rating=-, Insulation Color=Black, Manufacturer="Molex, LLC", Manufacturer Part Number=0194270109, Material Flammability Rating="UL94 V-0", Supplier Part Number 1=0194270109-ND, Applications="Automotive, General Purpose, Industrial", Category="Connectors, Interconnects", ComponentLink1Description=https://www.molex.com/pdm_docs/sd/194270109_sd.pdf, ComponentLink1URL=https://www.molex.com/pdm_docs/sd/194270109_sd.pdf, Connector Type=Header, Contact Finish - Mating=Gold, Contact Finish - Post=Tin, Contact Finish Thickness - Mating="30.0µin (0.76µm)", Contact Finish Thickness - Post="100.0µin (2.54µm)", Contact Length - Mating=-, Contact Length - Post="0.134\" (3.40mm)", Contact Material="Copper Alloy", Contact Shape=Square, Contact Type="Male Pin", Fastening Type="Locking Ramp", Features="Board Guide", Ingress Protection=-, Insulation Height="1.147\" (29.13mm)", Insulation Material="Polybutylene Terephthalate (PBT), Glass Filled", Mated Stacking Heights=-, Mounting Type="Panel Mount, Through Hole, Right Angle", Number of Positions=2, Number of Positions Loaded=All, Number of Rows=1, Operating Temperature=-, Overall Contact Length=-, Packaging=Tray, Part Status=Active, Pitch - Mating="0.230\" (5.84mm)", Pricing 1="1040=3.59614 (CAD)", RoHS="RoHS Compliant", Row Spacing - Mating=-, Shrouding="Shrouded - 4 Wall", Stock 1=0, Style="Board to Cable/Wire", Supplier 1=Digi-Key, Termination=Solder, Voltage Rating=-
P2: library part "CONN 2POS DURA-CLIK 0.079\" VERT", "2 Positions Header, Shrouded Connector 0.079\" (2.00mm) Surface Mount, Vertical Tin", Current Rating=-, Insulation Color=Natural, Manufacturer="Molex, LLC", Manufacturer Part Number=5600200220, Supplier Part Number 1=WM10862CT-ND, Applications="Automotive, Industrial", Category="Connectors, Interconnects", ComponentLink1Description=http://www.molex.com/pdm_docs/sd/5600200220_sd.pdf, ComponentLink1URL=http://www.molex.com/pdm_docs/sd/5600200220_sd.pdf, Connector Type=Header, Contact Finish - Mating=Tin, Contact Finish - Post=Tin, Contact Finish Thickness - Mating=-, Contact Finish Thickness - Post=-, Contact Length - Mating=-, Contact Length - Post=-, Contact Material="Copper Alloy", Contact Shape=Square, Contact Type="Male Pin", Fastening Type="Latch Lock", Features="Solder Retention", Ingress Protection=-, Insulation Height="0.315\" (8.00mm)", Insulation Material="Polyamide (PA), Nylon", Mated Stacking Heights=9.3mm, Material Flammability Rating=-, Mounting Type="Surface Mount", Number of Positions=2, Number of Positions Loaded=All, Number of Rows=1, Operating Temperature=-, Overall Contact Length=-, Packaging="Cut Tape (CT)", Part Status=Active, Pitch - Mating="0.079\" (2.00mm)", Pricing 1="1=1.16, 10=1.012, 25=0.952, 50=0.9122, 100=0.8727, 250=0.79336 (CAD)", RoHS="RoHS Compliant", Row Spacing - Mating=-, Shrouding="Shrouded - 4 Wall", Stock 1=11912, Style="Board to Cable/Wire", Supplier 1=Digi-Key, Termination=Solder, Voltage Rating=-
P3: "Connector Header Panel Mount, Through Hole, Right Angle 4 position 0.230\" (5.84mm)"
P4 P5: "Connector Header Panel Mount, Through Hole, Right Angle 6 position 0.230\" (5.84mm)", Colour=Black, Current Rating=18A, Flammability Rating="UL94 V-0", Manufacturer=Molex, Manufacturer Part Number=19427-0018, Max Operating Temperature=125°C, Min Operating Temperature=-40°C, Package Quantity=1, Supplier Part Number 1=WM17506-ND, Voltage Rating=600V, ComponentLink1Description=https://datasheet.ciiva.com/4554/0194270018-pcb-headers-135602-4554916.pdf, ComponentLink1URL=https://datasheet.ciiva.com/4554/0194270018-pcb-headers-135602-4554916.pdf, ComponentLink2Description=https://datasheet.ciiva.com/16725/0194270018-pcb-headers-16725700.pdf, ComponentLink2URL=https://datasheet.ciiva.com/16725/0194270018-pcb-headers-16725700.pdf, ComponentLink3Description=https://datasheet.ciiva.com/714/194270018-sd-714250.pdf, ComponentLink3URL=https://datasheet.ciiva.com/714/194270018-sd-714250.pdf, Connector Type="Male Pin", Contact Material="Copper Alloy", Contact Plating=Nickel,Tin, ELV=Compliant, Fastening Type=Ramp, Gender=Male, Glow Wire Compliant=Non-compliant, Housing Colour=Black, Housing Material=Polyester, Lead Free="Lead Free", Mount="Through Hole,Panel", Number of Circuits=6, Number of Contacts=6, Number of Positions=6, Number of Rows=2, Orientation="Right Angle", Packaging=Tray, Pitch=5.84mm, Pricing 1="1=6.02, 10=5.773, 100=4.769, 500=4.016, 1000=3.514 (USD)", Radiation Hardening=No, Row Spacing=0.23inch, Series=MX150L, Stock 1=2808, Supplier 1=Digi-Key, Termination=Solder
R1: "820 Ohms ±5% 0.75W, 3/4W Chip Resistor 2010 (5025 Metric) Automotive AEC-Q200 Thick Film", Manufacturer="Stackpole Electronics Inc.", Manufacturer Part Number=RMCF2010JT820R, Operating Temperature="-55°C ~ 155°C", Package / Case="2010 (5025 Metric)", Power=3/4W, Power (Watts)="0.75W, 3/4W", Resistance=820, Supplier Device Package=2010, Supplier Part Number 1=RMCF2010JT820RCT-ND, Temperature Coefficient=±200ppm/°C, Tolerance=±5%, Category=Resistors, ComponentLink1Description=https://www.seielect.com/Catalog/SEI-RMCF_RMCP.pdf, ComponentLink1URL=https://www.seielect.com/Catalog/SEI-RMCF_RMCP.pdf, Composition="Thick Film", Failure Rate=-, Features="Automotive AEC-Q200", Height - Seated (Max)="0.028\" (0.70mm)", Packaging="Cut Tape (CT)", Part Status=Active, Pricing 1="1=0.35, 10=0.291, 100=0.1135, 1000=0.04752 (CAD)", RoHS="RoHS Compliant", Size / Dimension="0.197\" L x 0.098\" W (5.00mm x 2.50mm)", Stock 1=9416, Supplier 1=Digi-Key
R2: "255k Ohm ±1% 0.1W, 1/10W Chip Resistor 0603 (1608 Metric) Moisture Resistant Thick Film", Manufacturer 1=Yageo, Manufacturer Part Number 1=RC0603FR-07255KL, Operating Temperature="-55°C ~ 155°C", Package / Case="0603 (1608 Metric)", Power (Watts)=1/10W, Resistance (Ohms)=255k, Supplier Device Package=0603, Supplier Part Number 1=311-255KHRCT-ND, Temperature Coefficient=±100ppm/°C, Tolerance=±1%, Category=Resistors, ComponentLink1Description=http://www.yageo.com/documents/recent/PYu-RC_Group_51_RoHS_L_7.pdf, ComponentLink1URL=http://www.yageo.com/documents/recent/PYu-RC_Group_51_RoHS_L_7.pdf, Composition="Thick Film", Description 1="RES SMD 255K OHM 1% 1/10W 0603", Failure Rate=-, Features="Moisture Resistant", Height - Seated (Max)="0.022\" (0.55mm)", Packaging="Cut Tape (CT)", Part Status=Active, Pricing 1="1=0.16, 10=0.022, 100=0.0089, 1000=0.00402, 2500=0.00349 (CAD)", RoHS="RoHS Compliant", Size / Dimension="0.063\" L x 0.031\" W (1.60mm x 0.80mm)", Stock 1=106564, Supplier 1=Digi-Key
R3: "39.2k Ohm ±1% 0.1W, 1/10W Chip Resistor 0603 (1608 Metric) Moisture Resistant Thick Film", Manufacturer 1=Yageo, Manufacturer Part Number 1=RC0603FR-0739K2L, Operating Temperature="-55°C ~ 155°C", Package / Case="0603 (1608 Metric)", Power=1/10W, Resistance=39.2k, Supplier Device Package=0603, Supplier Part Number 1=311-39.2KHRCT-ND, Temperature Coefficient=±100ppm/°C, Tolerance=±1%, ComponentLink1Description=http://www.yageo.com/documents/recent/PYu-RC_Group_51_RoHS_L_7.pdf, ComponentLink1URL=http://www.yageo.com/documents/recent/PYu-RC_Group_51_RoHS_L_7.pdf, Composition="Thick Film", Failure Rate=-, Height - Seated (Max)="0.022\" (0.55mm)", Packaging="Cut Tape (CT)", Part Status=Active, Size / Dimension="0.063\" L x 0.031\" W (1.60mm x 0.80mm)", Supplier 1=Digi-Key
R4: "191k Ohm ±1% 0.1W, 1/10W Chip Resistor 0603 (1608 Metric) Moisture Resistant Thick Film", Manufacturer 1=Yageo, Manufacturer Part Number 1=RC0603FR-07191KL, Operating Temperature="-55°C ~ 155°C", Package / Case="0603 (1608 Metric)", Power=1/10W, Resistance=191k, Supplier Device Package=0603, Supplier Part Number 1=311-191KHRCT-ND, Temperature Coefficient=±100ppm/°C, Tolerance=±1%, ComponentLink1Description=http://www.yageo.com/documents/recent/PYu-RC_Group_51_RoHS_L_7.pdf, ComponentLink1URL=http://www.yageo.com/documents/recent/PYu-RC_Group_51_RoHS_L_7.pdf, Composition="Thick Film", Failure Rate=-, Height - Seated (Max)="0.022\" (0.55mm)", Packaging="Cut Tape (CT)", Part Status=Active, Size / Dimension="0.063\" L x 0.031\" W (1.60mm x 0.80mm)", Supplier 1=Digi-Key
R5 R15 R16 R17 R18 R19: "3.3k Ohm ±1% 0.25W, 1/4W Chip Resistor 0603 (1608 Metric) Automotive AEC-Q200, Pulse Withstanding Thick Film", Manufacturer 1="Panasonic Electronic Components", Manufacturer Part Number 1=ERJ-PA3F3301V, Operating Temperature="-55°C ~ 155°C", Package / Case="0603 (1608 Metric)", Power=1/4W, Resistance=3.3k, Supplier Device Package=0603, Supplier Part Number 1=P3.3KBYCT-ND, Temperature Coefficient=±100ppm/°C, Tolerance=±1%, ComponentLink1Description=https://industrial.panasonic.com/cdbs/www-data/pdf/RDO0000/AOA0000C291.pdf, ComponentLink1URL=https://industrial.panasonic.com/cdbs/www-data/pdf/RDO0000/AOA0000C291.pdf, Composition="Thick Film", Failure Rate=-, Height - Seated (Max)="0.022\" (0.55mm)", Packaging="Cut Tape (CT)", Part Status=Active, Size / Dimension="0.063\" L x 0.031\" W (1.60mm x 0.80mm)", Supplier 1=Digi-Key
R6 R7 R9 R10 R11: "RES SMD 10K OHM 1% 1/10W 0603", Manufacturer 1=Yageo, Manufacturer Part Number 1=RC0603FR-0710KL, Operating Temperature="-55°C ~ 155°C", Package / Case="0603 (1608 Metric)", Power=1/10W, Resistance=10k, Supplier Device Package=0603, Supplier Part Number 1=311-10.0KHRCT-ND, Temperature Coefficient=±100ppm/°C, Tolerance=±1%, ComponentLink1Description=http://www.yageo.com/documents/recent/PYu-RC_Group_51_RoHS_L_7.pdf, ComponentLink1URL=http://www.yageo.com/documents/recent/PYu-RC_Group_51_RoHS_L_7.pdf, Composition="Thick Film", Failure Rate=-, Height - Seated (Max)="0.022\" (0.55mm)", Packaging="Cut Tape (CT)", Part Status=Active, Size / Dimension="0.063\" L x 0.031\" W (1.60mm x 0.80mm)", Supplier 1=Digi-Key
R8 R13: "100 Ohm ±1% 0.1W, 1/10W Chip Resistor 0603 (1608 Metric) Moisture Resistant Thick Film", Manufacturer 1=Yageo, Manufacturer Part Number 1=RC0603FR-07100RL, Operating Temperature="-55°C ~ 155°C", Package / Case="0603 (1608 Metric)", Power=1/10W, Resistance=100, Supplier Device Package=0603, Supplier Part Number 1=311-100HRCT-ND, Temperature Coefficient=±100ppm/°C, Tolerance=±1%, ComponentLink1Description=http://www.yageo.com/documents/recent/PYu-RC_Group_51_RoHS_L_7.pdf, ComponentLink1URL=http://www.yageo.com/documents/recent/PYu-RC_Group_51_RoHS_L_7.pdf, Composition="Thick Film", Failure Rate=-, Height - Seated (Max)="0.022\" (0.55mm)", Packaging="Cut Tape (CT)", Part Status=Active, Size / Dimension="0.063\" L x 0.031\" W (1.60mm x 0.80mm)", Supplier 1=Digi-Key
R12: "RES SMD 470K OHM 1% 1/4W 0603", Manufacturer 1="Panasonic Electronic Components", Manufacturer Part Number 1=ERJ-PA3F4703V, Operating Temperature="-55°C ~ 155°C", Package / Case="0603 (1608 Metric)", Power=1/4W, Resistance=470k, Supplier Device Package=0603, Supplier Part Number 1=P470KBYCT-ND, Temperature Coefficient=±100ppm/°C, Tolerance=±1%, ComponentLink1Description=https://industrial.panasonic.com/cdbs/www-data/pdf/RDO0000/AOA0000C291.pdf, ComponentLink1URL=https://industrial.panasonic.com/cdbs/www-data/pdf/RDO0000/AOA0000C291.pdf, Composition="Thick Film", Failure Rate=-, Height - Seated (Max)="0.022\" (0.55mm)", Packaging="Cut Tape (CT)", Part Status=Active, Size / Dimension="0.063\" L x 0.031\" W (1.60mm x 0.80mm)", Supplier 1=Digi-Key
R14: "RES SMD 26.1K OHM 1% 1/10W 0603", Manufacturer 1=Yageo, Manufacturer Part Number 1=RC0603FR-0726K1L, Operating Temperature="-55°C ~ 155°C", Package / Case="0603 (1608 Metric)", Power=1/10W, Resistance=26.1k, Supplier Device Package=0603, Supplier Part Number 1=311-26.1KHRCT-ND, Temperature Coefficient=±100ppm/°C, Tolerance=±1%, ComponentLink1Description=http://www.yageo.com/documents/recent/PYu-RC_Group_51_RoHS_L_7.pdf, ComponentLink1URL=http://www.yageo.com/documents/recent/PYu-RC_Group_51_RoHS_L_7.pdf, Composition="Thick Film", Failure Rate=-, Height - Seated (Max)="0.022\" (0.55mm)", Packaging="Cut Tape (CT)", Part Status=Active, Size / Dimension="0.063\" L x 0.031\" W (1.60mm x 0.80mm)", Supplier 1=Digi-Key
S1 S2: library part "SW SPST 2POS DIP 0.1A 20V", "SWITCH SLIDE DIP SPST 100MA 20V", Current Rating=100mA, Manufacturer="CTS Electrocomponents", Manufacturer Part Number=219-2MST, Operating Temperature="-55°C ~ 85°C", Supplier Part Number 1=CT2192MST-ND, Voltage Rating=20VDC, Actuator Level=Raised, Actuator Type="Slide (Standard)", Body Material=-, Category=Switches, Circuit=SPST, ComponentLink1Description=https://www.ctscorp.com/wp-content/uploads/219.pdf, ComponentLink1URL=https://www.ctscorp.com/wp-content/uploads/219.pdf, Contact Finish=Gold, Contact Material="Beryllium Copper", Electrical Life="2,000 Cycles", Features="Epoxy Sealed Terminals, Tape Seal", Height Above Board="0.170\" (4.33mm)", Length="0.258\" (6.55mm)", Mechanical Life=-, Mounting Type="Surface Mount", Packaging=Tube, Part Status=Active, Pitch="0.100\" (2.54mm), Full", Pricing 1="1=0.84, 10=0.818, 25=0.7708, 50=0.7234, 100=0.6921, 250=0.66056, 500=0.59762, 1000=0.55044, 5000=0.44822 (CAD)", RoHS="RoHS Compliant", Stock 1=444, Supplier 1=Digi-Key, Termination Style="Gull Wing", Washable=Yes
U1: "Buck Switching Regulator IC Positive Adjustable 0.8V 1 Output 100mA 10-TFSOP, 10-MSOP (0.118\", 3.00mm Width)", Current - Output=100mA, Frequency - Switching="100kHz ~ 2.2MHz", Manufacturer 1="Maxim Integrated", Manufacturer Part Number 1=MAX17552AUB+, Operating Temperature="-40°C ~ 125°C (TJ)", Package / Case="10-TFSOP, 10-MSOP (0.118\", 3.00mm Width)", Supplier Device Package=10-uMAX, Supplier Part Number 1=MAX17552AUB+-ND, Voltage - Input (Max)=60V, Voltage - Input (Min)=4V, Voltage - Output (Max)=54V, Voltage - Output (Min/Fixed)=0.8V, ComponentLink1Description=http://datasheets.maximintegrated.com/en/ds/MAX17552.pdf, ComponentLink1URL=http://datasheets.maximintegrated.com/en/ds/MAX17552.pdf, Function=Step-Down, Mounting Type="Surface Mount", Number of Outputs=1, Output Configuration=Positive, Output Type=Adjustable, Packaging=Tube, Part Status=Active, Supplier 1=Digi-Key, Synchronous Rectifier=Yes, Topology=Buck
U2: "Linear Voltage Regulator IC Positive Fixed Output 5V 100mA SOT-23-5", Current - Limit (Min)=-, Current - Output=100mA, Manufacturer 1=STMicroelectronics, Manufacturer Part Number 1=LD2981CM50TR, Operating Temperature="-40°C ~ 125°C", Package / Case="SC-74A, SOT-753", Supplier Device Package=SOT-23-5, Supplier Part Number 1=497-7787-1-ND, Voltage - Dropout (Typical)="0.18V @ 100mA", Voltage - Input="Up to 16V", Voltage - Output=5V, ComponentLink1Description=http://www.st.com/content/ccc/resource/technical/document/datasheet/group1/b7/b5/a1/83/9c/bd/4a/90/CD00001635/files/CD00001635.pdf/jcr:content/translations/en.CD00001635.pdf, ComponentLink1URL=http://www.st.com/content/ccc/resource/technical/document/datasheet/group1/b7/b5/a1/83/9c/bd/4a/90/CD00001635/files/CD00001635.pdf/jcr:content/translations/en.CD00001635.pdf, Mounting Type="Surface Mount", Packaging="Cut Tape (CT)", Part Status=Active, Regulator Topology="Positive Fixed", Supplier 1=Digi-Key
U3 U5: "General Purpose Amplifier 1 Circuit Rail-to-Rail SOT-23-5", Current - Output / Channel=50mA, Current - Supply=400µA, Manufacturer 1="Texas Instruments", Manufacturer Part Number 1=TLV316QDBVRQ1, Operating Temperature="-40°C ~ 125°C", Package / Case="SC-74A, SOT-753", Supplier Device Package=SOT-23-5, Supplier Part Number 1=296-45323-1-ND, Voltage - Supply, Single/Dual (±)="1.8 V ~ 5.5 V, ±0.9 V ~ 2.75 V", -3db Bandwidth=-, Amplifier Type="General Purpose", Category="Integrated Circuits (ICs)", ComponentLink1Description=http://www.ti.com/lit/ds/symlink/tlv316-q1.pdf, ComponentLink1URL=http://www.ti.com/lit/ds/symlink/tlv316-q1.pdf, Description 1="IC OP AMP GP RR 10MHZ 5-SOT-23", Mounting Type="Surface Mount", Number of Circuits=1, Output Type=Rail-to-Rail, Packaging="Cut Tape (CT)", Part Status=Active, Pricing 1="1=1.33, 10=1.185, 100=0.9234, 500=0.76276, 1000=0.60218 (CAD)", RoHS="RoHS Compliant", Slew Rate="6 V/µs", Stock 1=1747, Supplier 1=Digi-Key
U4: "16 Bit Analog to Digital Converter 2 Input 1 Sigma-Delta 10-MSOP", Base Part Number=MCP3427, Manufacturer="Microchip Technology", Manufacturer Part Number=MCP3427-E/UN, Operating Temperature="-40°C ~ 125°C", Package / Case="10-TFSOP, 10-MSOP (0.118\", 3.00mm Width)", Supplier Device Package=10-MSOP, Supplier Part Number 1=MCP3427-E/UN-ND, Voltage - Supply, Analog="2.7 V ~ 5.5 V", Architecture=Sigma-Delta, Category="Integrated Circuits (ICs)", ComponentLink1Description=http://www.microchip.com/mymicrochip/filehandler.aspx?ddocname=en546216, ComponentLink1URL=http://www.microchip.com/mymicrochip/filehandler.aspx?ddocname=en546216, Configuration=MUX-PGA-ADC, Data Interface=I²C, Features="PGA, Selectable Address", Input Type=Differential, Number of Bits=16, Number of Inputs=2, Packaging=Tube, Part Status=Active, Pricing 1="1=4.32, 25=3.6064, 100=3.2704 (CAD)", Ratio - S/H:ADC=-, Reference Type=Internal, RoHS="RoHS Compliant", Sampling Rate (Per Second)=15, Stock 1=3001, Supplier 1=Digi-Key, Voltage - Supply, Digital="2.7 V ~ 5.5 V"
U6: "I²C Digital Isolator 3750Vrms 2 Channel 35kV/µs CMTI 8-SOIC (0.154\", 3.90mm Width)", Case/Package=SOIC, Isolated Power=No, Manufacturer 1="Silicon Labs", Manufacturer Part Number 1=SI8600AC-B-ISR, Max Operating Temperature=125°C, Min Operating Temperature=-40°C, Package Quantity=2500, Supplier Part Number 1=SI8600AC-B-ISRCT-ND, Channel Type=Bidirectional, ComponentLink1Description=https://datasheet.ciiva.com/14921/supportdocuments2ftechnicaldocs2fsi860x-14921653.pdf, ComponentLink1URL=https://datasheet.ciiva.com/14921/supportdocuments2ftechnicaldocs2fsi860x-14921653.pdf, Data Rate=10Mbps, Number of Channels=2, Number of Pins=8, Packaging="Tape and Reel", Polarity=Bidirectional, Pricing 1="1=3.33, 25=3.2084, 100=3.0849 (USD)", Propagation Delay=26ns, Pulse Width Distortion (PWD)=32ns, Stock 1=4033, Supplier 1=Digi-Key, Weight=0.006596oz
U7: "Buffer, ReDriver 2 Channel 400kHz 10-TSSOP", Base Part Number=PCA9615, Current - Supply=16µA, Manufacturer="NXP USA Inc.", Manufacturer Part Number=PCA9615DPJ, Operating Temperature="-40°C ~ 85°C", Package / Case="10-TFSOP, 10-MSOP (0.118\", 3.00mm Width)", Supplier Device Package=10-TSSOP, Supplier Part Number 1=568-11484-1-ND, Voltage - Supply="2.3 V ~ 5.5 V", Applications=I²C, Category="Integrated Circuits (ICs)", ComponentLink1Description=http://www.nxp.com/documents/data_sheet/PCA9615.pdf, ComponentLink1URL=http://www.nxp.com/documents/data_sheet/PCA9615.pdf, Data Rate (Max)=400kHz, Delay Time=-, Input="2-Wire Bus", Number of Channels=2, Output="2-Wire Bus", Packaging="Cut Tape (CT)", Part Status=Active, Pricing 1="1=4.38, 10=3.93, 100=3.2205, 500=2.74156, 1000=2.31216 (CAD)", RoHS="RoHS Compliant", Signal Conditioning=-, Stock 1=7673, Supplier 1=Digi-Key, Type="Buffer, ReDriver"

## Free pads (board coordinates)
  round 3.5 hole 4: ""(23.5,24)
  round 2.7 hole 4: ""(23.5,56) ""(106.5,24) ""(106.5,56)

## Via types
v1: diameter 0.6, hole 0.3, Top Layer to Bottom Layer, 65 vias

## Nets (pads, with @x,y where several pads share a name; then routed paths per layer and width w, separated by ;. In a path a pad name is that pad's centre, name@x,y a point inside that pad or via, vN(x,y) a via of type N, cw(c..) or ccw(c..) an arc to the next point about the centre after c; other vN are vias at no path point)
3V3: 3V3.TP C11.1 C12.1 C13.1 C14.1 C15.1 C16.1 P4.1 P5.1 R17.1 R18.1 R19.1 U6.8 U7.1 U7.10
+6V: 6V.TH_TP C1.1 C2.1 L1.2 R2.2 U2.1 U2.3 | length 0.1
  Top Layer w0.254: L1.2@47.107,47.957 L1.2@47.151,47.913
ADC_ADR0: S1.1 S1.3 U4.9 | length 31.8
  Top Layer w0.254: v1(41.7,35.1) 41.7,34.5 U4.9
  Bottom Layer w0.254: S1.3 15.064,34.812 15.075,35.115 15.09,35.1 v1(41.7,35.1)
ADC_ADR1: S2.1 S2.3 U4.10 | length 36.1
  Top Layer w0.254: v1(18.1,36.3) v1(18.1,40) ; U4.10@43.35,35.05 U4.10 v1(43.4,36.3)
  Bottom Layer w0.254: S2.1 S2.3 15.04,40 v1(18.1,40) ; v1(18.1,36.3) v1(43.4,36.3)
DSCL_N: P4.2 P5.2 U7.6 | length 121.3
  Top Layer w0.254: U7.6@78.7,55.624 78.7,59.264 80.49,61.054 90.354,61.054 94.3,65 94.3,66.245 P4.2
  Bottom Layer w0.381: P5.2 41.455,8 52,8 88.135,44.135 88.135,52.135 94.3,58.3 94.3,66.245 P4.2
DSCL_P: P4.3 P5.3 U7.7 | length 132.1
  Top Layer w0.254: U7.7 78.2,54.364 78.6,53.964 79.2,53.964 79.475,54.239 79.475,59.264 80.811,60.6 90.542,60.6 94.754,64.812 94.754,66.519 P4.3
  Bottom Layer w0.381: P5.3 36.25,7.365 52.263,7.365 88.77,43.872 88.77,51.872 94.935,58.037 94.935,66.7 P4.3
DSDA_N: P4.5 P5.5 U7.9 | length 148.3
  Top Layer w0.254: U7.9 77.2,60.642 79.012,62.454 84.412,62.454 88.379,66.421 88.379,70.579 90.233,72.433 93.933,72.433 94.3,72.8 94.3,74.7 93.9,75.1 91.645,75.1 P4.5
  Bottom Layer w0.381: P5.5 41.505,2.1 49.1,2.1 90.5,43.5 90.5,50.763 101.965,62.228 101.965,69.372 98.837,72.5 96.2,72.5 93.775,74.925 P4.5
DSDA_P: P4.6 P5.6 U7.8 | length 148.9
  Top Layer w0.254: U7.8@77.7,55.644 77.7,60.5 79.2,62 84.6,62 88.833,66.233 88.833,70.391 90.421,71.979 94.379,71.979 97.31,74.91 P4.6
  Bottom Layer w0.381: P5.6 36.3,1.465 49.363,1.465 91.135,43.237 91.135,50.5 102.6,61.965 102.6,69.635 P4.6 P4.6@97.31,75.11
FB: R2.1 R3.1 U1.5 | length 4.8
  Top Layer w0.254: U1.5 38.211,48.089 38.6,47.7 R3.1 R2.1
GND: C11.2 C12.2 C13.2 C14.2 C15.2 C16.2 GND.TP LED2.2 P4.4 P5.4 U6.5 U7.5 | length 1.2
  Bottom Layer w0.254: v1(41.931,17.7) LED2.2
  other v1: 54,2.5 55.5,2.5 54,4 55.5,4 48,4.5 49.5,4.5 55.5,5.5 48,6 49.5,6 51,6 94.5,52 96,52 96,53.5 90,56.5 90,58 91.5,58 104.5,67 101,68 104.5,68.5 100.5,69.5 104.5,70 99.5,70.5 93,71 94,71 95,71 103.5,71 98.5,71.5 102.5,72 88,73 89,73 89,74
LX: L1.1 U1.10 | length 6.8
  Top Layer w0.254: U1.10 48.3,51.3 L1.1
MPPT_5V: 5V.TH_TP C3.1 C5.1 C7.1 C8.1 C10.1 F1.2 R5.1 R6.1 R7.1 R15.1 R16.1 U2.5 U3.5 U4.6 U5.5 U6.1 | length 0
  Top Layer w0.254: U3.5 U3.5@29.1,32.875
  other v1: 44.6,30.3 44.6,32.1 44.9,36.2 31.8,37.4 33.4,37.4 35.6,37.4 37.1,37.4 46,37.6
MPPT_GND: C1.2 C2.2 C3.2 C4.2 C5.2 C6.2 C7.2 C8.2 C9.2 C10.2 LED1.2 P3.3 P3.4 R3.2 R4.2 R9.2 R10.2 R11.2 R14.2 TP5.TH_TP TP6.TH_TP TP7.TH_TP U1.6 U1.9 U2.2 U3.2 U4.2 U4.3 U4.5 U5.2 U6.4 | length 3.3
  Top Layer w0.254: v1(37.625,40.725) C2.2 ; v1(40.351,49.8) 40.351,49.549 40.6,49.3 ; v1(42.504,40.8) U2.2
  other v1: 3.4,29.4 4.9,38.3 29.1,39.7 31.2,40.1 49.5,40.5 47.7,41.2 21.5,41.4 37.4,45.5 34,46.3 43.3,48.3 44.3,50.2 40.7,51.3 39.8,56.5 35.6,57.5
MPPT_HV: P3.1 P3.2 R1.1 R12.1 TP1.TH_TP TP2.TH_TP
NetF1_1: F1.1 P2.1 | length 18.9
  Top Layer w0.254: v1(15,27.5) 17.1,27.5 19.4,29.8 19.4,34.6 19.9,35.1 F1.1
  Bottom Layer w0.254: P2.1 11.48,27.5 v1(15,27.5)
NetLED1_1: LED1.1 R5.2 | length 1.7
  Bottom Layer w0.254: R5.2 6.285,46.99 LED1.1
NetLED2_1: LED2.1 R19.2 | length 1.7
  Bottom Layer w0.254: LED2.1 46.291,17.7 R19.2
NetP2_2: P2.2 R9.1 TP8.TP U3.3 | length 21
  Top Layer w0.254: TP8.TP 21.5,32.4 v1(21.5,31) 23.475,31 R9.1 23.575,30.95 U3.3
  Bottom Layer w0.254: P2.2 9.4,29.4 9.7,29.7 15.6,29.7 16.9,31 v1(21.5,31)
NetR4_1: R4.1 U1.3 | length 4.6
  Top Layer w0.254: U1.3 39.4,50.3 39.7,50.6 R4.1
NetR6_2: R6.2 S2.2 | length 3
  Bottom Layer w0.254: R6.2 3.45,42.475 S2.2
NetR7_2: R7.2 S1.2 | length 3.1
  Bottom Layer w0.254: R7.2 6.165,35.025 S1.2
NetR8_1: R8.1 U3.1 U3.4 | length 5.9
  Top Layer w0.254: U3.1 27.175,32.85 U3.4 31.212,30.95 R8.1
NetR10_1: R10.1 S1.4 | length 3
  Bottom Layer w0.254: R10.1 6.35,32.3 S1.4
NetR11_1: R11.1 S2.4 | length 3
  Bottom Layer w0.254: R11.1 6.31,40 S2.4
NetR12_2: R12.2 R14.1 TP10.TP U5.3 | length 11.3
  Top Layer w0.254: TP10.TP 24.15,38.5 24.475,38.825 R14.1 ; R12.2 24.4,41.475 R14.1 ; U5.3 24.525,41.35 R14.1
NetR13_1: R13.1 U5.1 U5.4 | length 6.6
  Top Layer w0.254: U5.1 28.75,43.25 29.05,42.95 29.05,41.65 29.35,41.35 U5.4 32.699,41.35 R13.1
NetR15_2: R15.2 TP12.TP U4.7 U6.3 | length 9.8
  Top Layer w0.254: U4.7 45.8,33.5 ; R15.2 45.8,33.5 ; TP12.TP 47.381,33.381 47.5,33.5 ; U6.3 49.135,33.065 48.7,33.5 47.5,33.5 ; 45.8,33.5 47.5,33.5
NetR16_2: R16.2 TP13.TP U4.8 U6.2 | length 9.7
  Top Layer w0.254: U4.8 46,34 ; TP13.TP 46.019,34.019 46,34 ; R16.2 47.6,34 ; U6.2 50.69,34.325 49.025,34.325 48.7,34 47.6,34 ; 46,34 47.6,34
NetR17_2: R17.2 TP14.TP U6.6 U7.4 | length 38.8
  Top Layer w0.254: U6.6 v1(64.3,33.065) 67.465,33.065 78.2,43.8 78.2,45.5 ; v1(64.3,35.2) R17.2@64.3,36.5 ; U7.4 78.2,45.5 ; TP14.TP 78.2,45.5
  Bottom Layer w0.254: v1(64.3,33.065) v1(64.3,35.2)
NetR18_2: R18.2 TP15.TP U6.7 U7.2 | length 35.8
  Top Layer w0.254: U6.7 61.7,34.335 ; R18.2 61.7,34.335 ; TP15.TP 77.2,45.5 ; U7.2 77.2,45.5 ; 61.7,34.335 66.935,34.335 77.2,44.6 77.2,45.5
NetTP16_TP: TP16.TP U7.3 | length 6
  Top Layer w0.254: U7.3 77.7,52.6 TP16.TP
PV_IN+: P1.1 TH_TP1.TH_TP TH_TP2.TH_TP
PV_IN-: P1.2 TH_TP3.TH_TP TH_TP4.TH_TP
REG_VIN: C4.1 R1.2 U1.1 U1.2
TEMP_SENSE_OUT: C6.1 R8.2 TP9.TP U4.4 | length 10.2
  Top Layer w0.254: R8.2 36,32.361 ; TP9.TP 36,32.361 ; U4.4 37.6,33.5 36.461,32.361 36,32.361
VOLT_SENSE_OUT: C9.1 R13.2 TP11.TP U4.1 | length 13.1
  Top Layer w0.254: R13.2 C9.1 34.275,35.425 34.7,35 U4.1 39,37.2 TP11.TP
pads on no net: P1. P2.3 P3. P4. P5. U1.4 U1.7 U1.8 U2.4

## Polygon pours and split planes (outlines as drawn)
GND on Top Layer "GND_L01_P075" (solid, pour order 75): 55.3,40.7 57.6,40.7 57.6,80 120,80 120,0 41.4,0 41.4,22.6 55.3,22.6
MPPT_GND on Top Layer "MPPT_GND_L01_P065" (solid, pour order 65): 0,24.1 20,24.1 20,27 51.5,27 51.5,42.9 53,42.9 53,80 0,80
PV_IN+ on Top Layer "PV_IN+_L01_P069" (solid, pour order 69): 102,32 88,18 88,0 120,0 120,54 112,54 102,44
MPPT_5V on Top Layer "MPPT_5V_L01_P057" (solid, pour order 57): 42.7,33.5 47.1,33.5 47.1,29.5 42.7,29.5
MPPT_5V on Top Layer "MPPT_5V_L01_P053" (solid, pour order 53): 27.2,35.7 27.2,36.1 25.1,36.1 25.1,34.1 26.3,34.1 26.3,32.875 26.325,32.85 27.175,32.85 29.075,30.95 30.8,30.95 30.8,32.3 30.7,32.4 34.45,32.4 34.45,37.9 31.4,37.9 31.4,35.7
MPPT_5V on Top Layer "MPPT_5V_L01_P051" (solid, pour order 51): 32.046,44.3 32.046,43.825 29.926,43.825 29.926,41.724 31.724,41.724 34.3,41.724 34.3,35.4 34.7,35 43.4,35 43.4,34 51.5,34 51.5,38.4 46.5,38.4 46.5,41.3 46.4,41.4 37.8,41.4 37.8,43.7 36,43.7 36,44.3